# Altium PCB Mini_Breadboard.PcbDoc
Units mil, origin at the board's own origin, x right, y up, seen from the top; angles counter-clockwise.
Board outline 1732.28 x 1732.28 mil, 2 copper layers (Top Layer, Bottom Layer), stack 62.209 mil thick; 2 components, 72 nets, 182 pads, 0 vias.
Unrouted connection lines stored in the file: 5.
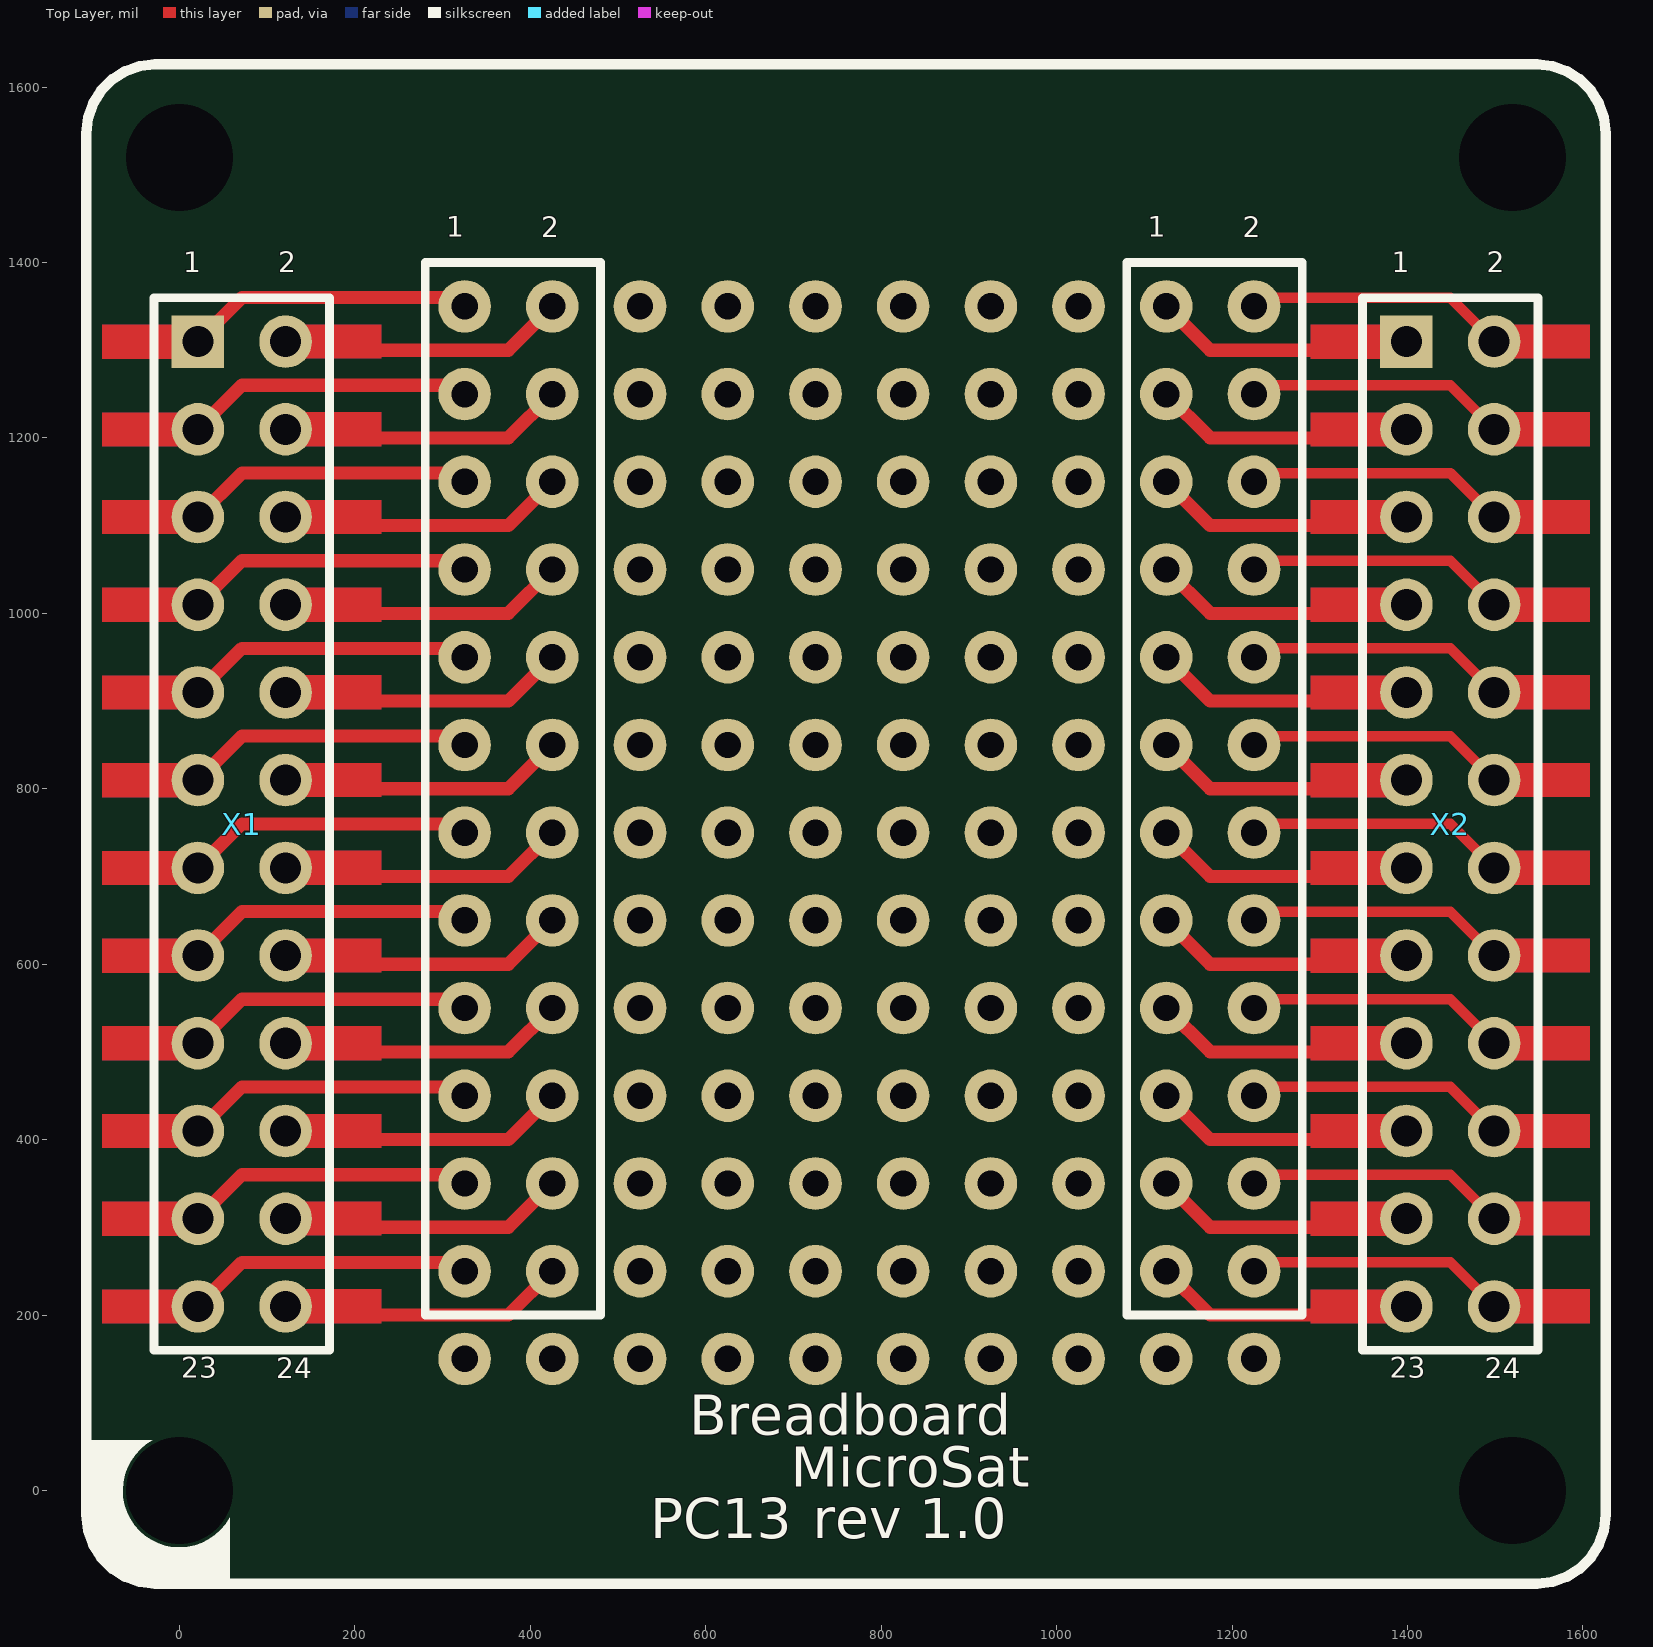
[diagram p0: Top Layer view]
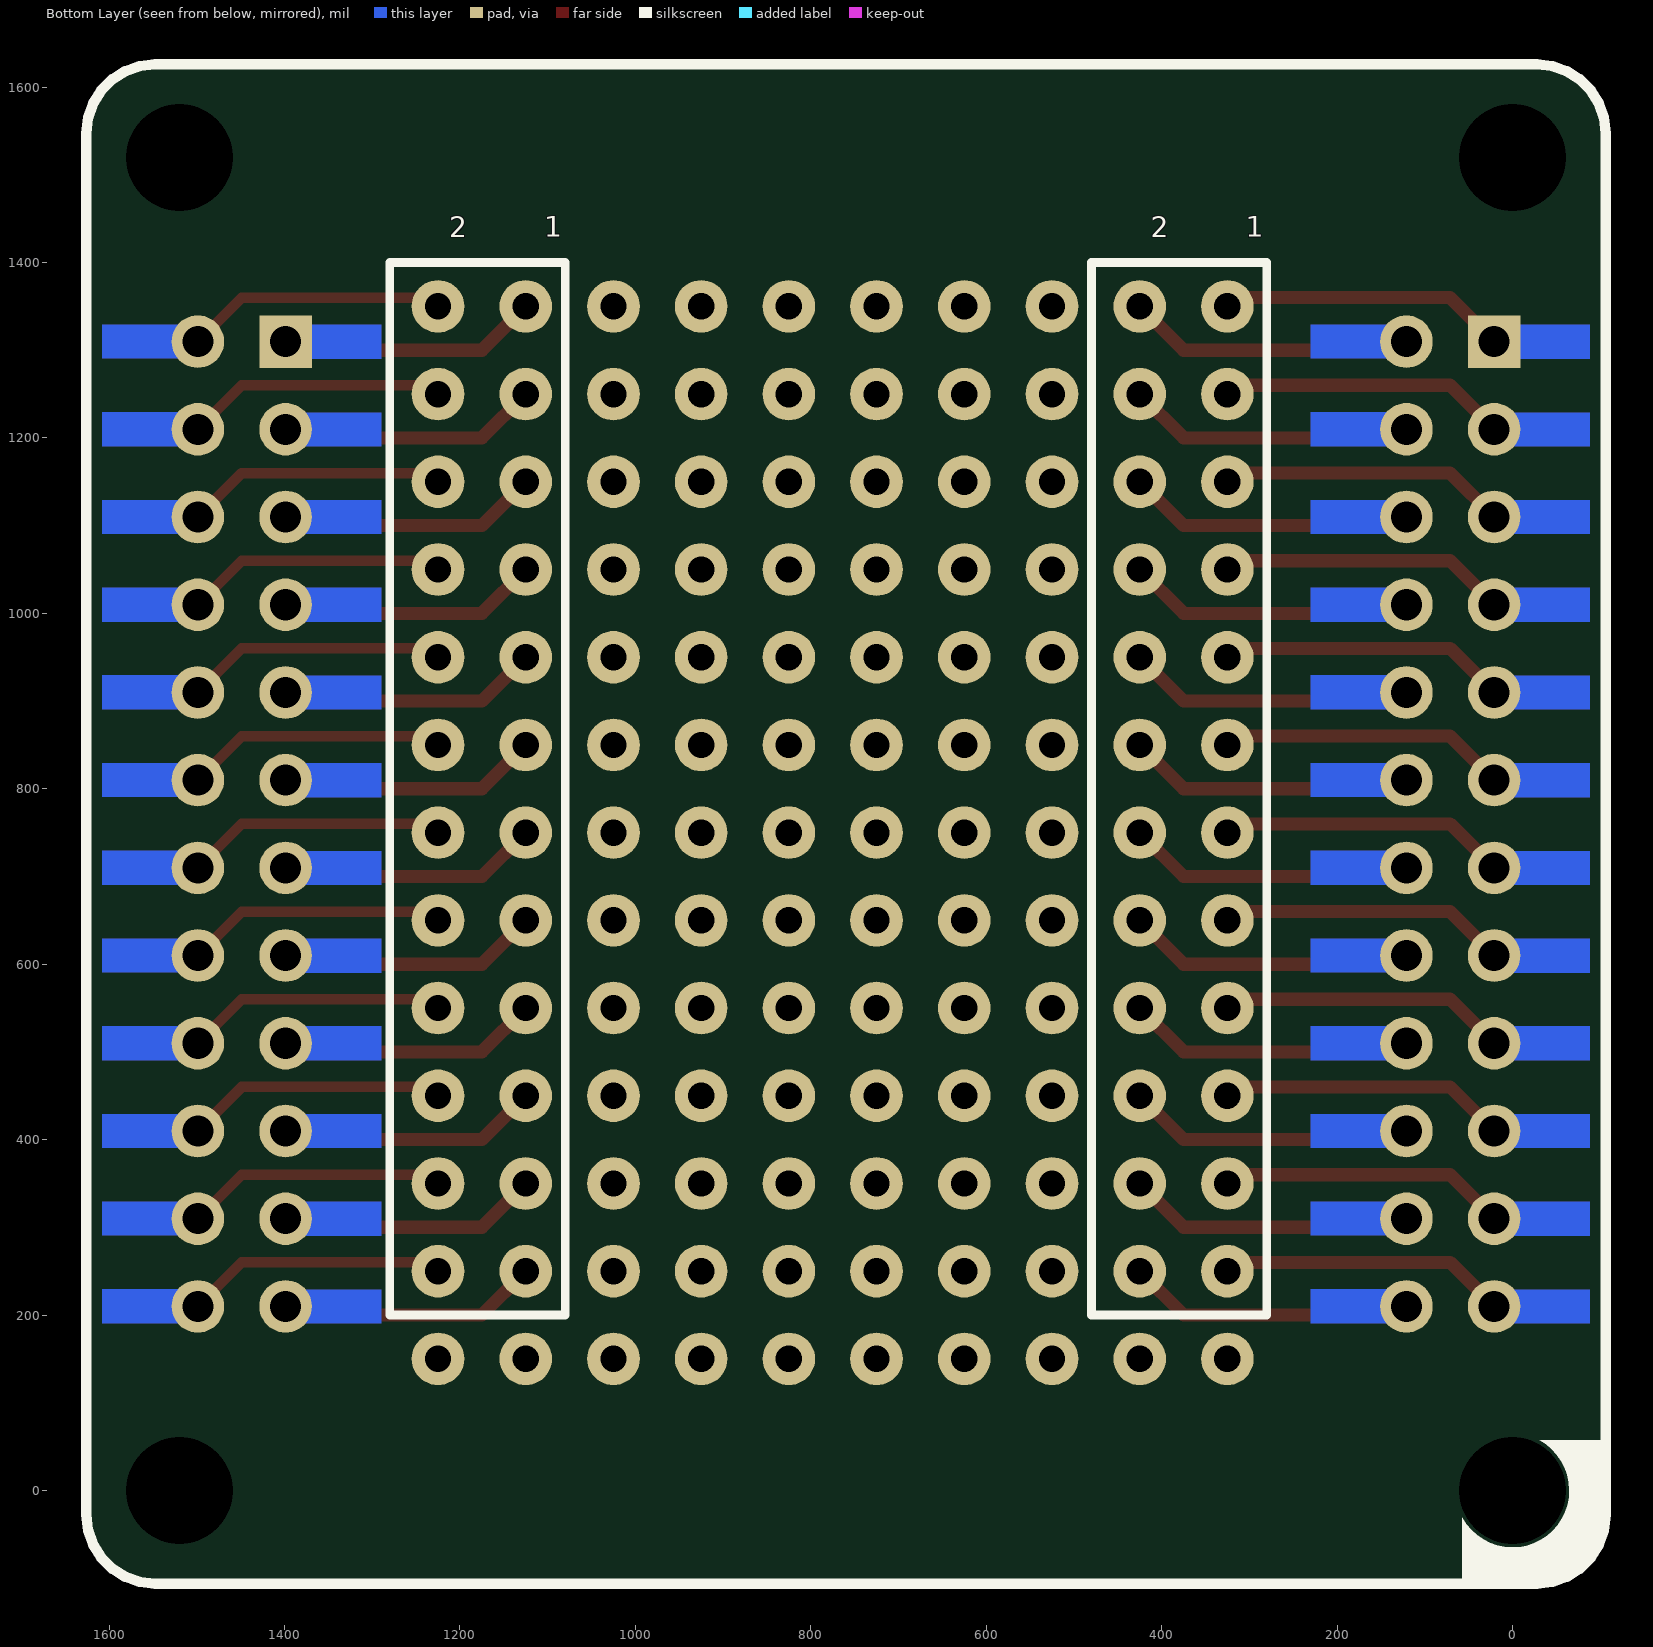
[diagram p1: Bottom Layer view, seen from below]

## Layer stack, top to bottom
Top Solder: solder mask 0.4, Solder Resist, Dk 3.5
Top Layer: signal copper 1.4
Dielectric 1: dielectric 59.4094, FR-4, Dk 4.8
Bottom Layer: signal copper 1.4
Bottom Solder: solder mask 0.4, Solder Resist, Dk 3.5

## Board outline
-106.3,-27.56 -104.33,-45.08 -98.5,-61.72 -89.12,-76.65 -76.65,-89.12 -61.72,-98.5 -45.08,-104.33 -27.56,-106.3 1547.24,-106.3 1564.77,-104.33 1581.41,-98.5 1596.34,-89.12 1608.81,-76.65 1618.19,-61.72 1624.01,-45.08 1625.98,-27.56 1625.98,1547.24 1624.01,1564.77 1618.19,1581.41 1608.81,1596.34 1596.34,1608.81 1581.41,1618.19 1564.77,1624.01 1547.24,1625.98 -27.56,1625.98 -45.08,1624.01 -61.72,1618.19 -76.65,1608.81 -89.12,1596.34 -98.5,1581.41 -104.33,1564.77 -106.3,1547.24

## Design rules (kind name [scope] priority, off if disabled: settings)
BoardOutlineClearance [All] p1: gap=11.81 ignorepadtopadclearanceinfootprint=FALSE
Clearance Clearance_MultiLayerPad [OnLayer('Multi-Layer') and IsPad] p1: gap=7.87 ignorepadtopadclearanceinfootprint=FALSE except(0: Arc-Hole Track-Hole SMDPad-Hole THPad-Hole Via-Hole Fill-Hole Poly-Hole Region-Hole Text-Hole)
Clearance Clearance_Polygon [InPolygon] p2: gap=5.91 ignorepadtopadclearanceinfootprint=FALSE except(0: Arc-Hole Track-Hole SMDPad-Hole THPad-Hole Via-Hole Fill-Hole Poly-Hole Region-Hole Text-Hole; 7.87: Arc-Poly Arc-Region Track-Poly Track-Region SMDPad-Poly SMDPad-Region THPad-Poly THPad-Region Via-Poly Via-Region Fill-Poly Fill-Region Poly-Poly Poly-Region)
Clearance [All] p3: gap=5.91 ignorepadtopadclearanceinfootprint=FALSE except(0: Arc-Hole Track-Hole SMDPad-Hole THPad-Hole Via-Hole Fill-Hole Poly-Hole Region-Hole Text-Hole)
ComponentClearance [All] p1: gap=19.68 collisioncheckmode=3 verticalgap=19.68 showdistances=FALSE
DiffPairsRouting [All] p1: maxlimit=15.75 minlimit=5.91 mostfreqgap=11.81 toplayer_minwidth=5.91 toplayer_maxwidth=11.81 toplayer_prefwidth=5.91 bottomlayer_minwidth=5.91 bottomlayer_maxwidth=11.81 bottomlayer_prefwidth=5.91 maxuncoupledlength=500
Height [All] p1: minheight=0 maxheight=1968.5 prefheight=500
HoleSize [All] p1: absolutevalues=TRUE maxlimit=393.7 minlimit=11.81 maxpercent=80.000 minpercent=20.000
HoleToHoleClearance [All] p1: gap=11.81 allowstackedmicrovias=TRUE
MinimumSolderMaskSliver [All] p1: minsoldermaskwidth=7.87
PlaneClearance [All] p1: clearance=19.68
PlaneConnect [All] p1: planeconnectstyle=Relief reliefexpansion=19.68 reliefentries=4 reliefconductorwidth=11.81 reliefairgap=7.87
PolygonConnect PolygonConnect_PadGND [InNet('GND') and IsPad] p1: connectstyle=Relief reliefconductorwidth=11.81 reliefentries=4 polygonreliefangle="90 Angle" airgapwidth=7.87
PolygonConnect PolygonConnect_Via [IsVia] p2: connectstyle=Direct reliefconductorwidth=10 reliefentries=4 polygonreliefangle="90 Angle" airgapwidth=10
PolygonConnect [All] p3: connectstyle=Relief reliefconductorwidth=11.81 reliefentries=4 polygonreliefangle="90 Angle" airgapwidth=7.87
RoutingVias [All] p1: holewidth=11.81 width=27.56 viastyle="Through Hole" minholewidth=11.81 minwidth=23.62 maxholewidth=19.68 maxwidth=47.24
SilkToSolderMaskClearance [IsPad] p1: minsilkscreentomaskgap=7.87 clearancetoexposedcopper=TRUE
SolderMaskExpansion [All] p1: expansion=2.95 istentingtop=FALSE
Width [All] p1: maxlimit=393.7 minlimit=6 preferedwidth=9
21 further rules are at their usual default settings.

## Components (designator, comment, footprint, x,y, rotation, side; value= is the part's Value field where it differs from the comment)
X1 "PLD24 + PBD24" PICOSAT_CNN 70.87,759.84 r270 top
X2 "PLD24 + PBD24" PICOSAT_CNN 1448.82,759.84 r270 top

## Footprints (in the part's own frame and the unit in brackets; to place one, negate y for a bottom-side part, rotate by r counter-clockwise, add the part's x,y. Pads: shape width x height; smd on the part's side, far side on the other; paste and mask are expansions set on the pad)
PICOSAT_CNN [mil]
  rect 60x60 hole 35.43: 1(-550,-50)
  round 60 hole 35.43: 2(-550,50) 3(-450,-50) 4(-450,50) 5(-350,-50) 6(-350,50) 7(-250,-50) 8(-250,50) 9(-150,-50) 10(-150,50) 11(-50,-50) 12(-50,50) 13(50,-50) 14(50,50) 15(150,-50) 16(150,50) 17(250,-50) 18(250,50) 19(350,-50) 20(350,50) 21(450,-50) 22(450,50) 23(550,-50) 24(550,50)
  Top Layer region: -369.45,-159.19 -330.39,-159.19 -330.39,-54.51 -369.45,-54.51
  Top Layer region: 469.45,159.19 430.39,159.19 430.39,54.51 469.45,54.51
  Top Layer region: 69.45,159.16 30.39,159.16 30.39,54.48 69.45,54.48
  Top Layer region: -269.45,-159.19 -230.39,-159.19 -230.39,-54.51 -269.45,-54.51
  Top Layer region: -569.46,-159.17 -530.41,-159.17 -530.41,-54.5 -569.46,-54.5
  Top Layer region: -530.56,159.17 -569.62,159.17 -569.62,54.5 -530.56,54.5
  Top Layer region: -469.45,-159.19 -430.39,-159.19 -430.39,-54.51 -469.45,-54.51
  Top Layer region: -330.55,159.16 -369.61,159.16 -369.61,54.48 -330.55,54.48
  Top Layer region: -230.55,159.16 -269.61,159.16 -269.61,54.48 -230.55,54.48
  Top Layer region: -169.43,-159.17 -130.38,-159.17 -130.38,-54.5 -169.43,-54.5
  Top Layer region: -130.55,159.16 -169.61,159.16 -169.61,54.48 -130.55,54.48
  Top Layer region: -69.45,-159.16 -30.39,-159.16 -30.39,-54.48 -69.45,-54.48
  Top Layer region: -30.55,159.19 -69.61,159.19 -69.61,54.51 -30.55,54.51
  Top Layer region: 30.55,-159.19 69.61,-159.19 69.61,-54.51 30.55,-54.51
  Top Layer region: 130.55,-159.19 169.61,-159.19 169.61,-54.51 130.55,-54.51
  Top Layer region: 169.45,159.16 130.39,159.16 130.39,54.48 169.45,54.48
  Top Layer region: 269.45,159.16 230.39,159.16 230.39,54.48 269.45,54.48
  Top Layer region: 369.45,159.19 330.39,159.19 330.39,54.51 369.45,54.51
  Top Layer region: -430.55,159.16 -469.61,159.16 -469.61,54.48 -430.55,54.48
  Top Layer region: 569.45,159.16 530.39,159.16 530.39,54.48 569.45,54.48
  Top Layer region: 530.55,-159.19 569.61,-159.19 569.61,-54.51 530.55,-54.51
  Top Layer region: 430.55,-159.16 469.61,-159.16 469.61,-54.48 430.55,-54.48
  Top Layer region: 330.55,-159.16 369.61,-159.16 369.61,-54.48 330.55,-54.48
  Top Layer region: 230.55,-159.16 269.61,-159.16 269.61,-54.48 230.55,-54.48
  Bottom Layer region: -369.45,-159.19 -330.39,-159.19 -330.39,-54.51 -369.45,-54.51
  Bottom Layer region: -269.45,-159.19 -230.39,-159.19 -230.39,-54.51 -269.45,-54.51
  Bottom Layer region: 69.45,159.16 30.39,159.16 30.39,54.48 69.45,54.48
  Bottom Layer region: 469.45,159.19 430.39,159.19 430.39,54.51 469.45,54.51
  Bottom Layer region: -569.46,-159.17 -530.41,-159.17 -530.41,-54.5 -569.46,-54.5
  Bottom Layer region: -530.56,159.17 -569.62,159.17 -569.62,54.5 -530.56,54.5
  Bottom Layer region: -469.45,-159.19 -430.39,-159.19 -430.39,-54.51 -469.45,-54.51
  Bottom Layer region: -330.55,159.16 -369.61,159.16 -369.61,54.48 -330.55,54.48
  Bottom Layer region: -230.55,159.16 -269.61,159.16 -269.61,54.48 -230.55,54.48
  Bottom Layer region: -169.43,-159.17 -130.38,-159.17 -130.38,-54.5 -169.43,-54.5
  Bottom Layer region: -130.55,159.16 -169.61,159.16 -169.61,54.48 -130.55,54.48
  Bottom Layer region: -69.45,-159.16 -30.39,-159.16 -30.39,-54.48 -69.45,-54.48
  Bottom Layer region: -30.55,159.19 -69.61,159.19 -69.61,54.51 -30.55,54.51
  Bottom Layer region: 30.55,-159.19 69.61,-159.19 69.61,-54.51 30.55,-54.51
  Bottom Layer region: 130.55,-159.19 169.61,-159.19 169.61,-54.51 130.55,-54.51
  Bottom Layer region: 169.45,159.16 130.39,159.16 130.39,54.48 169.45,54.48
  Bottom Layer region: 269.45,159.16 230.39,159.16 230.39,54.48 269.45,54.48
  Bottom Layer region: 369.45,159.19 330.39,159.19 330.39,54.51 369.45,54.51
  Bottom Layer region: -430.55,159.16 -469.61,159.16 -469.61,54.48 -430.55,54.48
  Bottom Layer region: 230.55,-159.16 269.61,-159.16 269.61,-54.48 230.55,-54.48
  Bottom Layer region: 330.55,-159.16 369.61,-159.16 369.61,-54.48 330.55,-54.48
  Bottom Layer region: 430.55,-159.16 469.61,-159.16 469.61,-54.48 430.55,-54.48
  Bottom Layer region: 530.55,-159.19 569.61,-159.19 569.61,-54.51 530.55,-54.51
  Bottom Layer region: 569.45,159.16 530.39,159.16 530.39,54.48 569.45,54.48
  silkscreen extent -600,-100 600,100, body extent -600,-148 600,148, height 386

## Part data
X1 X2: library part "Header 2x12", "10x2 header", IsSMT=NoSMT
  X1: Purpose=BUS_Left

## Free pads (board coordinates)
  round 118.11 hole 122.05: 1(0,0) 1(0,1519.68) 1(1519.69,0) 1(1519.69,1519.68)
  round 60 hole 30: 1(325,150) 1(425,150) 1(525,150) 1(625,150) 1(725,150) 1(825,150) 1(925,150) 1(1025,150) 1(1125,150) 1(1225,150) 2(325,250) 2(425,250) 2(525,250) 2(625,250) 2(725,250) 2(825,250) 2(925,250) 2(1025,250) 2(1125,250) 2(1225,250) 3(325,350) 3(425,350) 3(525,350) 3(625,350) 3(725,350) 3(825,350) 3(925,350) 3(1025,350) 3(1125,350) 3(1225,350) 4(325,450) 4(425,450) 4(525,450) 4(625,450) 4(725,450) 4(825,450) 4(925,450) 4(1025,450) 4(1125,450) 4(1225,450) 5(325,550) 5(425,550) 5(525,550) 5(625,550) 5(725,550) 5(825,550) 5(925,550) 5(1025,550) 5(1125,550) 5(1225,550) 6(325,650) 6(425,650) 6(525,650) 6(625,650) 6(725,650) 6(825,650) 6(925,650) 6(1025,650) 6(1125,650) 6(1225,650) 7(325,750) 7(425,750) 7(525,750) 7(625,750) 7(725,750) 7(825,750) 7(925,750) 7(1025,750) 7(1125,750) 7(1225,750) 8(325,850) 8(425,850) 8(525,850) 8(625,850) 8(725,850) 8(825,850) 8(925,850) 8(1025,850) 8(1125,850) 8(1225,850) 9(325,950) 9(425,950) 9(525,950) 9(625,950) 9(725,950) 9(825,950) 9(925,950) 9(1025,950) 9(1125,950) 9(1225,950) 10(325,1050) 10(425,1050) 10(525,1050) 10(625,1050) 10(725,1050) 10(825,1050) 10(925,1050) 10(1025,1050) 10(1125,1050) 10(1225,1050) 11(325,1150) 11(425,1150) 11(525,1150) 11(625,1150) 11(725,1150) 11(825,1150) 11(925,1150) 11(1025,1150) 11(1125,1150) 11(1225,1150) 12(325,1250) 12(425,1250) 12(525,1250) 12(625,1250) 12(725,1250) 12(825,1250) 12(925,1250) 12(1025,1250) 12(1125,1250) 12(1225,1250) 13(325,1350) 13(425,1350) 13(525,1350) 13(625,1350) 13(725,1350) 13(825,1350) 13(925,1350) 13(1025,1350) 13(1125,1350) 13(1225,1350)

## Nets (pads, with @x,y where several pads share a name; then routed paths per layer and width w, separated by ;. In a path a pad name is that pad's centre, name@x,y a point inside that pad or via, vN(x,y) a via of type N, cw(c..) or ccw(c..) an arc to the next point about the centre after c; other vN are vias at no path point)
3V3: X1.5 X2.20 | length 627.8
  Top Layer w12: 1225,450 1235,460 1448.66,460 X2.20
  Top Layer w15: X1.5 71.02,1160 315,1160 325,1150
5V: X2.21 | length 229.9
  Top Layer w15: 1125,350 1175,300 1320,300 1330,310
5V_USB: X2.2 | length 298.8
  Top Layer w12: 1225,1350 1235,1360 1448.66,1360 X2.2
+3.3V: 
+5V: 
+5V_USB: 
ADC: X1.20 | length 272.1
  Top Layer w15: 177.69,409.92 187.61,400 375,400 425,450
BOOT: 
BOOT0: X1.11 | length 329.1
  Top Layer w15: X1.11 71.02,860 315,860 325,850
CPU_BOOT_RX: 
CPU_BOOT_TX: 
CS1: X2.16 | length 298.7
  Top Layer w12: 1225,650 1235,660 1448.66,660 X2.16
CS2: X2.14 | length 298.7
  Top Layer w12: 1225,750 1235,760 1448.66,760 X2.14
CS3: X2.12 | length 298.7
  Top Layer w12: 1225,850 1235,860 1448.66,860 X2.12
CS4: X2.10 | length 298.7
  Top Layer w12: 1225,950 1235,960 1448.66,960 X2.10
CS_RF: X2.7 | length 229.9
  Top Layer w15: 1125,1050 1175,1000 1320,1000 1330,1010
DQ: X2.6 | length 298.7
  Top Layer w12: 1225,1150 1235,1160 1448.66,1160 X2.6
GND: X1.7 X1.14 X1.22 X2.5 X2.18 | length 1401.9
  Top Layer w12: 1225,550 1235,560 1448.66,560 X2.18
  Top Layer w15: X1.7 71.02,1060 315,1060 325,1050 ; 177.71,309.92 187.64,300 375,300 425,350 ; 177.69,709.92 187.61,700 375,700 425,750 ; 1125,1150 1175,1100 1320,1100 1330,1110
MCU_TX2: 
MISO: X2.17 | length 229.9
  Top Layer w15: 1125,550 1175,500 1320,500 1330,510
MOSI: X2.15 | length 229.9
  Top Layer w15: 1125,650 1175,600 1320,600 1330,610
NetR4_2: 
NetR5_1: 
NetR6_2: 
NetR7_1: 
NetR8_1: 
NetR9_2: 
NetR10_1: 
NetR11_2: 
NetR12_1: 
NetR13_2: 
NetR14_2: 
NetR15_1: 
NetR16_2: 
NetR17_1: 
NetR18_2: 
NetR19_1: 
NetR20_2: 
NetR21_2: 
NetR23_2: 
NetR24_1: 
NetR25_2: 
NetR27_1: 
NetR28_1: 
NetR29_2: 
NetR30_1: 
NetR35_2: 
NetR36_1: 
NetR37_2: 
NetR38_1: 
NetR39_1: 
NetR40_2: 
NetR41_1: 
NetR42_2: 
NetR43_2: 
NetR44_1: 
NetR45_2: 
NetR46_1: 
RBF: X1.23 | length 329.1
  Top Layer w15: X1.23 71.02,260 315,260 325,250
RST: X1.18 | length 272.1
  Top Layer w15: 177.69,509.92 187.61,500 375,500 425,550
RX2: X2.24 | length 298.7
  Top Layer w12: 1225,250 1235,260 1448.66,260 X2.24
RX_A: X1.10 | length 272.1
  Top Layer w15: 177.69,909.92 187.61,900 375,900 425,950
RX_BT: X2.1 | length 229.9
  Top Layer w15: 1125,1350 1175,1300 1320,1300 1330,1310
SCK: X2.19 | length 229.9
  Top Layer w15: 1125,450 1175,400 1320,400 1330,410
SCL:  | length 272.1
  Top Layer w15: 177.69,809.92 187.61,800 375,800 425,850
SDA: 
SWCLK: X1.2 | length 272.1
  Top Layer w15: 177.69,1309.92 187.61,1300 375,1300 425,1350
SWIO: X1.1 | length 329.1
  Top Layer w15: X1.1 71.02,1360 315,1360 325,1350
TX2: X2.23 | length 229.9
  Top Layer w15: 1125,250 1175,200 1320,200 1330,210
TX_A: X1.9 | length 329.1
  Top Layer w15: X1.9 71.02,960 315,960 325,950
TX_BT: X2.3 | length 229.9
  Top Layer w15: 1125,1250 1175,1200 1320,1200 1330,1210
VBAT: X1.24 | length 272.1
  Top Layer w15: 177.69,209.92 187.61,200 375,200 425,250
pads on no net: X1.3 X1.4 X1.6 X1.8 X1.12 X1.13 X1.15 X1.16 X1.17 X1.19 X1.21 X2.4 X2.8 X2.9 X2.11 X2.13 X2.22
copper on no net: | length 4648.6
  Top Layer w12: 1225,350 1235,360 1448.66,360 1498.82,309.84 ; 1225,1050 1235,1060 1448.66,1060 1498.82,1009.84 ; 1225,1250 1235,1260 1448.66,1260 1498.82,1209.84
  Top Layer w15: 20.87,309.84 71.02,360 315,360 325,350 ; 20.87,409.84 71.02,460 315,460 325,450 ; 20.87,509.84 71.02,560 315,560 325,550 ; 20.87,609.84 71.02,660 315,660 325,650 ; 20.87,709.84 71.02,760 315,760 325,750 ; 20.87,1209.84 71.02,1260 315,1260 325,1250 ; 177.69,609.92 187.61,600 375,600 425,650 ; 177.69,1009.92 187.61,1000 375,1000 425,1050 ; 177.69,1109.92 187.61,1100 375,1100 425,1150 ; 177.69,1209.92 187.61,1200 375,1200 425,1250 ; 1125,750 1175,700 1320,700 1330,710 ; 1125,850 1175,800 1320,800 1330,810 ; 1125,950 1175,900 1320,900 1330,910

## Silkscreen, mask and mechanical layers (free items; w line width, h text height)
Top Overlay:
  region: -100.45,-44.2 -102.35,-38.77 -102.35,57.07 -31.13,57.07 ccw(c0,0) 57.07,-31.13 57.07,-102.35 -38.77,-102.35 -43.76,-100.6 -60,-94.92 -74.17,-86.01 -86.01,-74.17 -94.92,-60
  lines w10: 280,200 280,1400 480,1400 480,200 280,200 ; 1080,200 1080,1400 1280,1400 1280,200 1080,200
  lines w11.81: -106.3,-27.56 -106.3,1547.24 -104.33,1564.77 -98.5,1581.41 -89.12,1596.34 -76.65,1608.81 -61.72,1618.19 -45.08,1624.01 -27.56,1625.98 1547.24,1625.98 1564.77,1624.01 1581.41,1618.19 1596.34,1608.81 1608.81,1596.34 1618.19,1581.41 1624.01,1564.77 1625.98,1547.24 1625.98,-27.56 1624.01,-45.08 1618.19,-61.72 1608.81,-76.65 1596.34,-89.12 1581.41,-98.5 1564.77,-104.33 1547.24,-106.3 -27.56,-106.3 -45.08,-104.33 -61.72,-98.5 -76.65,-89.12 -89.12,-76.65 -98.5,-61.72 -104.33,-45.08 -106.3,-27.56
  text "1" at 304.11,1421.49 h40
  text "2" at 412.38,1421.06 h40
  text "1" at 1104.11,1421.49 h40
  text "2" at 1212.38,1421.06 h40
  text "1" at 4.11,1381.06 h40
  text "2" at 112.38,1381.06 h40
  text "1" at 1382.06,1381.06 h40
  text "2" at 1490.33,1381.06 h40
  text "23" at 1.97,120.59 h40
  text "24" at 110.24,120.08 h40
  text "23" at 1379.92,120.59 h40
  text "24" at 1488.19,120.08 h40
  text "Breadboard" at 580.88,47.82 h78.74
  text "MicroSat" at 696.64,-11.38 h78.74
  text "rev 1.0" at 721.77,-69.83 h78.74
  text "PC13" at 536.9,-70.18 h78.74
Bottom Overlay:
  region: -100.45,-44.2 -102.35,-38.77 -102.35,57.07 -31.13,57.07 ccw(c0,0) 57.07,-31.13 57.07,-102.35 -38.77,-102.35 -43.76,-100.6 -60,-94.92 -74.17,-86.01 -86.01,-74.17 -94.92,-60
  lines w10: 280,200 480,200 480,1400 280,1400 280,200 ; 1080,200 1280,200 1280,1400 1080,1400 1080,200
  lines w11.81: -106.3,-27.56 -106.3,1547.24 -104.33,1564.77 -98.5,1581.41 -89.12,1596.34 -76.65,1608.81 -61.72,1618.19 -45.08,1624.01 -27.56,1625.98 1547.24,1625.98 1564.77,1624.01 1581.41,1618.19 1596.34,1608.81 1608.81,1596.34 1618.19,1581.41 1624.01,1564.77 1625.98,1547.24 1625.98,-27.56 1624.01,-45.08 1618.19,-61.72 1608.81,-76.65 1596.34,-89.12 1581.41,-98.5 1564.77,-104.33 1547.24,-106.3 -27.56,-106.3 -45.08,-104.33 -61.72,-98.5 -76.65,-89.12 -89.12,-76.65 -98.5,-61.72 -104.33,-45.08 -106.3,-27.56
  text "1" at 304.11,1421.49 h40
  text "2" at 412.38,1421.06 h40
  text "1" at 1104.11,1421.49 h40
  text "2" at 1212.38,1421.06 h40
Border:
  the board outline again, w7.87
Size:
  circle w10: c759.84,759.84 r21.79